# Altium PCB KAI_MEZON.PcbDoc
Units mm, origin at the board's own origin, x right, y up, seen from the top; angles counter-clockwise.
Board outline 64.77 x 55.7 mm, 2 copper layers (Top Layer, Bottom Layer); 3 components, 70 nets, 139 pads, 0 vias.
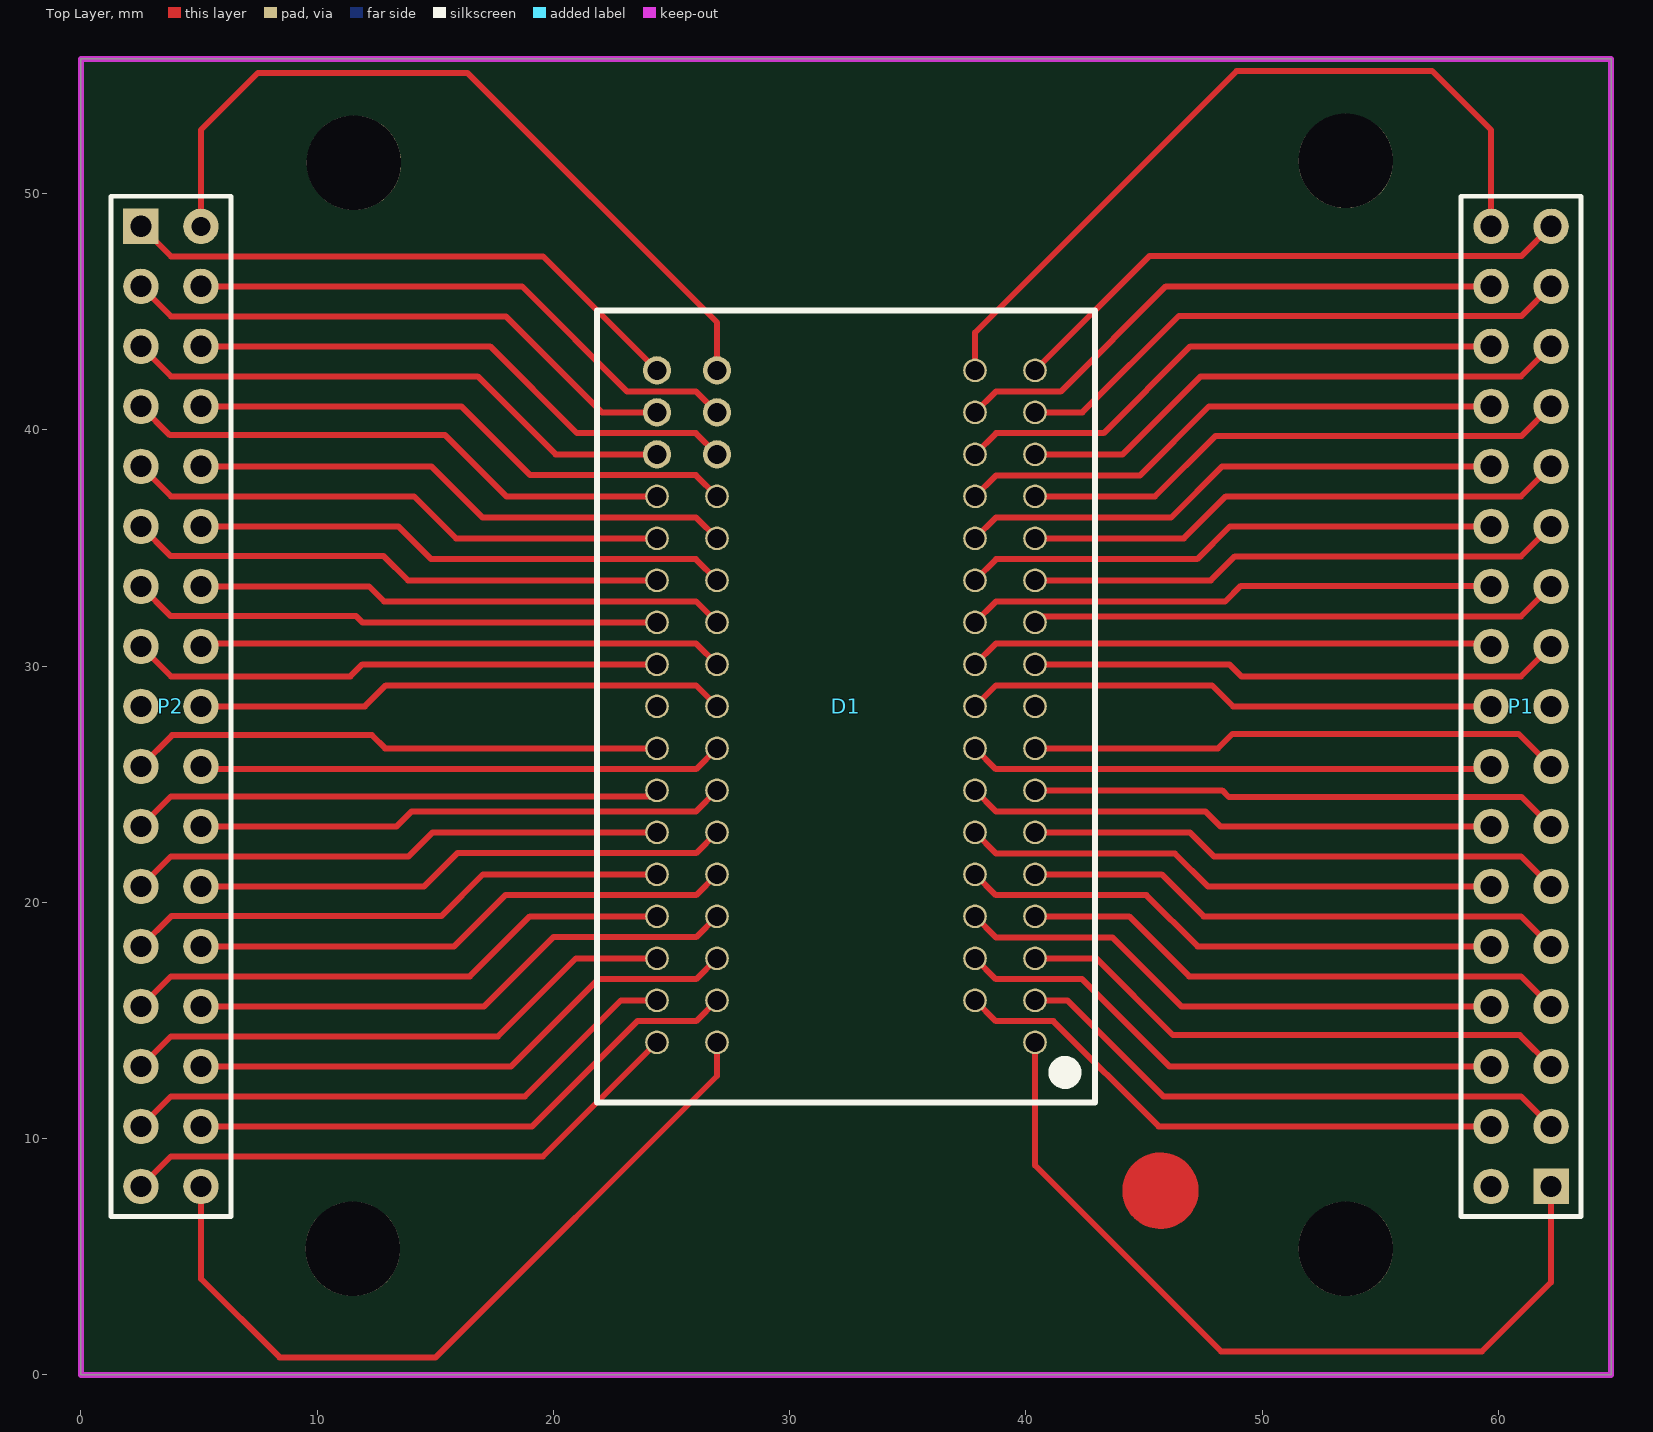
[diagram p0: Top Layer view]
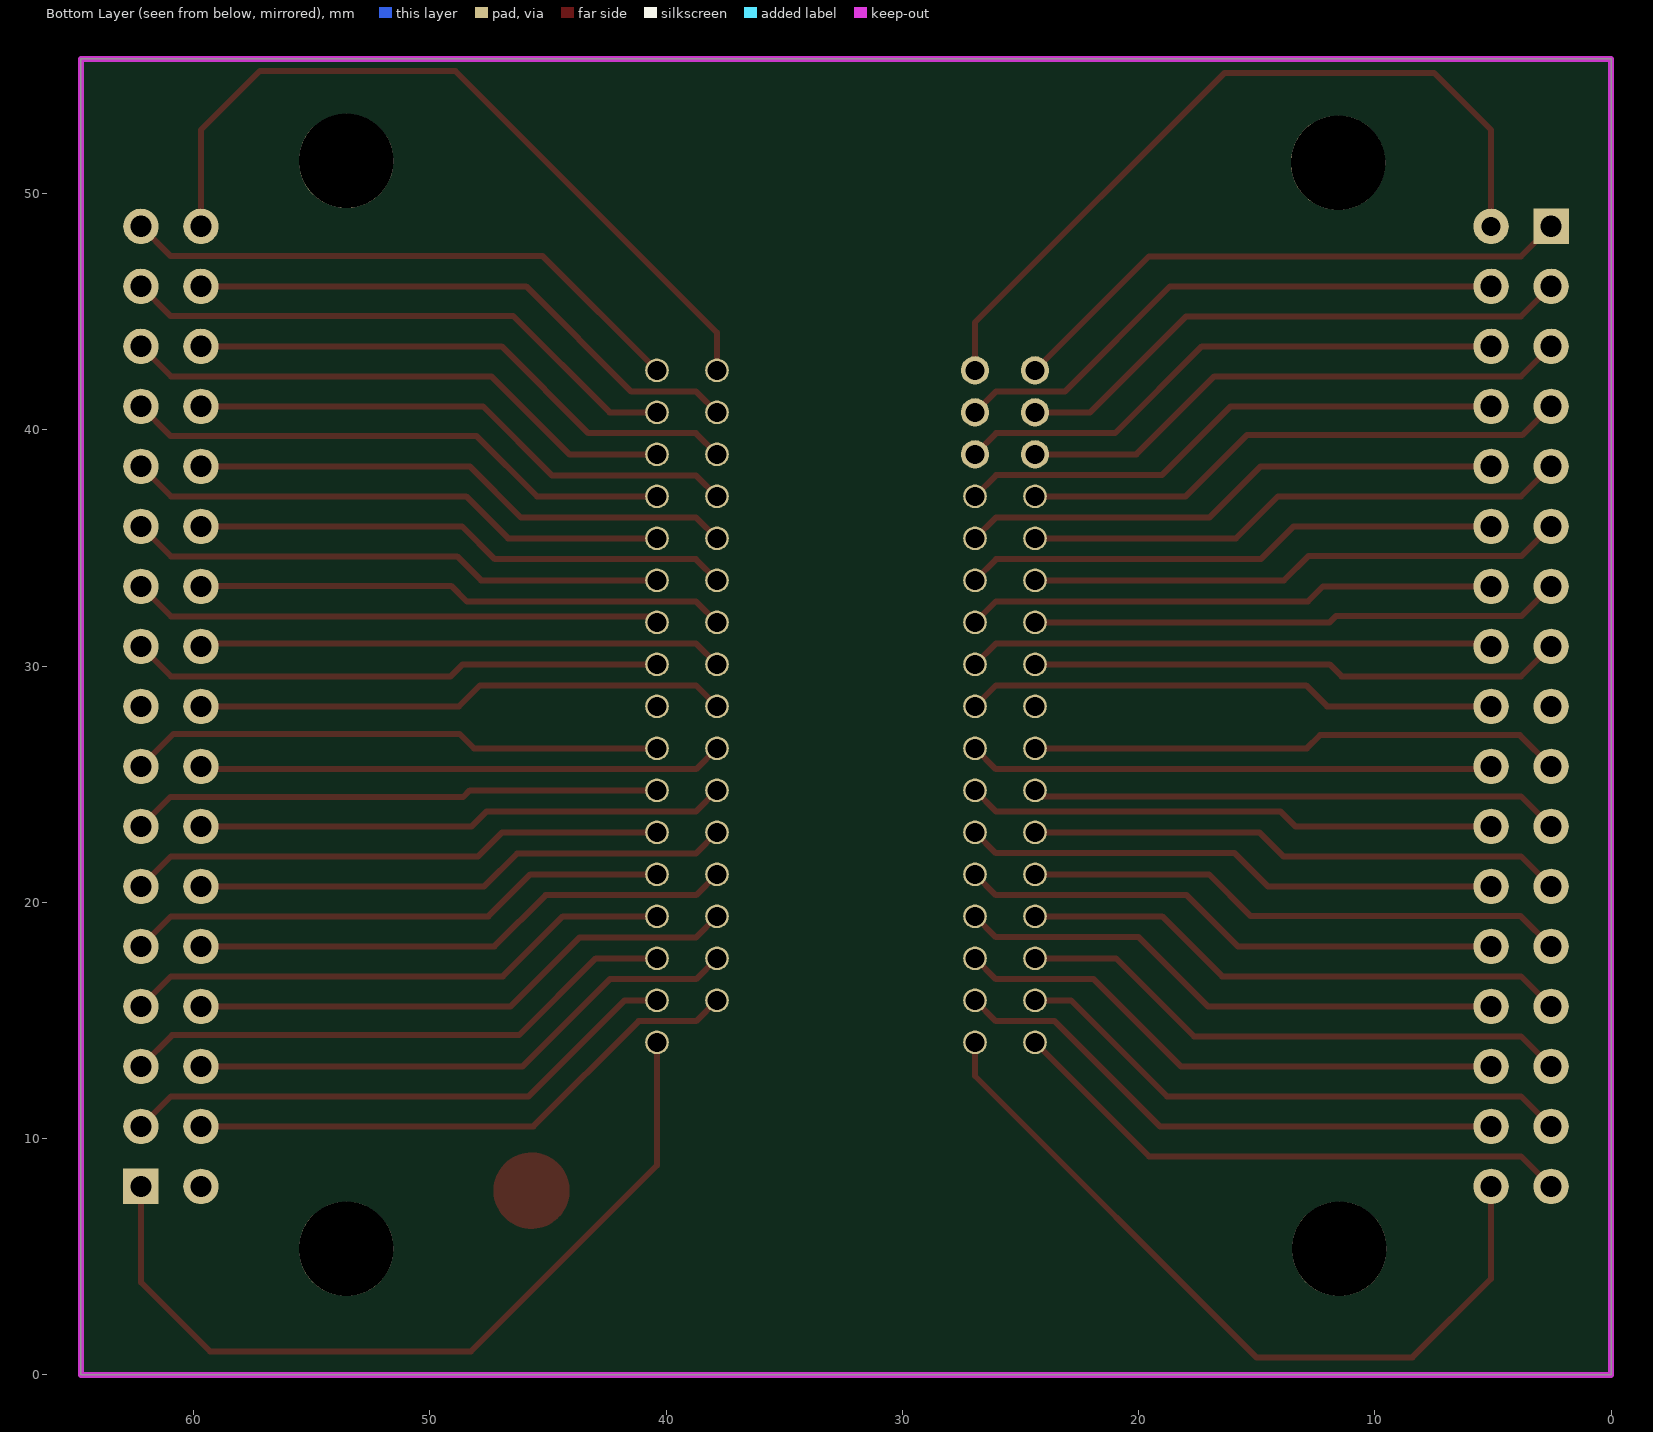
[diagram p1: Bottom Layer view, seen from below]

## Layer stack, top to bottom
Top Solder: solder mask 0.0102, Solder Resist, Dk 3.5
Top Layer: signal copper 0.0356
Dielectric 1: dielectric 0.32, FR-4, Dk 4.8
Bottom Layer: signal copper 0.0356
Bottom Solder: solder mask 0.0102, Solder Resist, Dk 3.5

## Board outline
0,0 0,55.702 64.77,55.702 64.77,0

## Design rules (kind name [scope] priority, off if disabled: settings)
Clearance [All] p1: gap=0.254
PolygonConnect [All] p1: connectstyle=Relief reliefconductorwidth=0.254 reliefentries=4 polygonreliefangle="90 Angle" airgapwidth=0.254
RoutingVias [All] p1: holewidth=0.711 width=1.27 viastyle="Through Hole" minholewidth=0.711 minwidth=1.27 maxholewidth=0.711 maxwidth=1.27
SolderMaskExpansion [All] p1: expansion=0.102
Width [All] p1: maxlimit=10.254 minlimit=0.125 preferedwidth=0.254
29 further rules are at their usual default settings.

## Classes and differential pairs
component class KAI_MEZON: D1 P2

## Components (designator, comment, footprint, x,y, rotation, side; value= is the part's Value field where it differs from the comment)
D1 "KAI02050" KAI_02050 40.386,14.072 r90 top
P1 "Header 17X2" HDR2X17#1 62.23,7.976 r90 top
P2 "Header 17X2" HDR2X17#2 2.54,48.616 r270 top

## Footprints (in the part's own frame and the unit in brackets; to place one, negate y for a bottom-side part, rotate by r counter-clockwise, add the part's x,y. Pads: shape width x height; smd on the part's side, far side on the other; paste and mask are expansions set on the pad)
HDR2X17#1 [mm] "Connector; Header; 17x2 Position"
  rect 1.5x1.5 hole 0.9: 1(0,0)
  round 1.5 hole 0.9: 2(0,2.54) 3(2.54,0) 4(2.54,2.54) 5(5.08,0) 6(5.08,2.54) 7(7.62,0) 8(7.62,2.54) 9(10.16,0) 10(10.16,2.54) 11(12.7,0) 12(12.7,2.54) 13(15.24,0) 14(15.24,2.54) 15(17.78,0) 16(17.78,2.54) 17(20.32,0) 18(20.32,2.54) 19(22.86,0) 20(22.86,2.54) 21(25.4,0) 22(25.4,2.54) 23(27.94,0) 24(27.94,2.54) 25(30.48,0) 26(30.48,2.54) 27(33.02,0) 28(33.02,2.54) 29(35.56,0) 30(35.56,2.54) 31(38.1,0) 32(38.1,2.54) 33(40.64,0) 34(40.64,2.54)
  silkscreen extent -1.27,-1.27 41.91,3.81
HDR2X17#2 [mm] "Connector; Header; 17x2 Position"
  rect 1.5x1.5 hole 0.9: 1(0,0)
  round 1.5 hole 0.8: 2(0,2.54)
  round 1.5 hole 0.9: 3(2.54,0) 4(2.54,2.54) 5(5.08,0) 6(5.08,2.54) 7(7.62,0) 8(7.62,2.54) 9(10.16,0) 10(10.16,2.54) 11(12.7,0) 12(12.7,2.54) 13(15.24,0) 14(15.24,2.54) 15(17.78,0) 16(17.78,2.54) 18(20.32,2.54) 19(22.86,0) 20(22.86,2.54) 21(25.4,0) 22(25.4,2.54) 23(27.94,0) 24(27.94,2.54) 25(30.48,0) 26(30.48,2.54) 27(33.02,0) 28(33.02,2.54) 29(35.56,0) 30(35.56,2.54) 31(38.1,0) 32(38.1,2.54) 33(40.64,0) 34(40.64,2.54) 51(20.32,0)
  silkscreen extent -1.27,-1.27 41.91,3.81
KAI_02050 [mm]
  round 1 hole 0.8: 1(0,0) 3(1.778,0) 4(1.778,2.54) 5(3.556,0) 6(3.556,2.54) 7(5.334,0) 8(5.334,2.54) 9(7.112,0) 10(7.112,2.54) 11(8.89,0) 12(8.89,2.54) 13(10.668,0) 14(10.668,2.54) 15(12.446,0) 16(12.446,2.54) 17(14.224,0) 18(14.224,2.54) 19(16.002,0) 20(16.002,2.54) 21(17.78,0) 22(17.78,2.54) 23(19.558,0) 24(19.558,2.54) 25(21.336,0) 26(21.336,2.54) 27(23.114,0) 28(23.114,2.54) 29(24.892,0) 30(24.892,2.54) 31(26.67,0) 32(26.67,2.54) 33(28.448,0) 34(28.448,2.54) 41(23.114,16.002) 42(23.114,13.462) 43(21.336,16.002) 44(21.336,13.462) 45(19.558,16.002) 46(19.558,13.462) 47(17.78,16.002) 48(17.78,13.462) 49(16.002,16.002) 50(16.002,13.462) 51(14.224,16.002) 52(14.224,13.462) 53(12.446,16.002) 54(12.446,13.462) 55(10.668,16.002) 56(10.668,13.462) 57(8.89,16.002) 58(8.89,13.462) 59(7.112,16.002) 60(7.112,13.462) 61(5.334,16.002) 62(5.334,13.462) 63(3.556,16.002) 64(3.556,13.462) 65(1.778,16.002) 66(1.778,13.462) 67(0,16.002) 68(0,13.462)
  round 1.2 hole 0.8: 35(28.448,16.002) 36(28.448,13.462) 37(26.67,16.002) 38(26.67,13.462) 39(24.892,16.002) 40(24.892,13.462)
  silkscreen extent -2.54,-2.54 30.99,18.54

## Part data
D1: library part KAI-02050
P1 P2: "Header, 17-Pin, Dual row"

## Free pads (board coordinates)
  round 4 hole 4: 0(11.506,5.334) 0(11.557,51.308) 0(53.543,5.334) 0(53.543,51.384)

## Nets (pads, with @x,y where several pads share a name; then routed paths per layer and width w, separated by ;. In a path a pad name is that pad's centre, name@x,y a point inside that pad or via, vN(x,y) a via of type N, cw(c..) or ccw(c..) an arc to the next point about the centre after c; other vN are vias at no path point)
1: D1.1 P1.1 | length 35.6
  Top Layer w0.254: D1.1 40.386,8.865 48.26,0.991 59.309,0.991 62.23,3.912 P1.1
3: D1.3 P1.3 | length 24.1
  Top Layer w0.254: D1.3 41.758,15.85 45.822,11.786 60.96,11.786 P1.3
4: D1.4 P1.4 | length 24.1
  Top Layer w0.254: D1.4 38.727,14.969 41.165,14.969 45.618,10.516 P1.4
5: D1.5 P1.5 | length 23.7
  Top Layer w0.254: D1.5 42.977,17.628 46.228,14.376 60.909,14.376 P1.5
6: D1.6 P1.6 | length 23.7
  Top Layer w0.254: D1.6 38.727,16.747 42.385,16.747 46.076,13.056 P1.6
7: D1.7 P1.7 | length 23.4
  Top Layer w0.254: D1.7 44.374,19.406 46.914,16.866 60.96,16.866 P1.7
8: D1.8 P1.8 | length 23.4
  Top Layer w0.254: D1.8 38.743,18.509 43.671,18.509 46.584,15.596 P1.8
9: D1.9 P1.9 | length 23.1
  Top Layer w0.254: D1.9 45.745,21.184 47.523,19.406 60.96,19.406 P1.9
10: D1.10 P1.10 | length 23.1
  Top Layer w0.254: D1.10 38.727,20.303 45.102,20.303 47.269,18.136 P1.10
11: D1.11 P1.11 | length 22.8
  Top Layer w0.254: D1.11 46.939,22.962 47.955,21.946 60.96,21.946 P1.11
12: D1.12 P1.12 | length 22.8
  Top Layer w0.254: D1.12 38.743,22.065 46.312,22.065 47.701,20.676 P1.12
13: D1.13 P1.13 | length 22.5
  Top Layer w0.254: D1.13 48.311,24.74 48.59,24.46 60.985,24.46 P1.13
14: D1.14 P1.14 | length 22.5
  Top Layer w0.254: D1.14 38.743,23.843 47.608,23.843 48.235,23.216 P1.14
15: D1.15 P1.15 | length 22.7
  Top Layer w0.254: D1.15 48.133,26.518 48.743,27.127 60.858,27.127 P1.15
16: D1.16 P1.16 | length 22.3
  Top Layer w0.254: D1.16 38.727,25.637 59.571,25.637 P1.16
17: D1.17
18: D1.18 P1.18 | length 22.6
  Top Layer w0.254: D1.18 38.735,29.185 47.879,29.185 48.768,28.296 P1.18
19: D1.19 P1.19 | length 22.6
  Top Layer w0.254: D1.19 48.616,30.074 49.124,29.566 60.96,29.566 P1.19
20: D1.20 P1.20 | length 22.3
  Top Layer w0.254: D1.20 38.727,30.955 59.571,30.955 P1.20
21: D1.21 P1.21 | length 22.5
  Top Layer w0.254: D1.21 40.64,32.106 60.96,32.106 P1.21
22: D1.22 P1.22 | length 22.5
  Top Layer w0.254: D1.22 38.727,32.733 48.43,32.733 49.098,33.401 59.665,33.401 P1.22
23: D1.23 P1.23 | length 22.8
  Top Layer w0.254: D1.23 47.828,33.63 48.844,34.646 60.96,34.646 P1.23
24: D1.24 P1.24 | length 22.8
  Top Layer w0.254: D1.24 38.743,34.527 47.252,34.527 48.641,35.916 P1.24
25: D1.25 P1.25 | length 23.1
  Top Layer w0.254: D1.25 46.685,35.408 48.463,37.186 60.96,37.186 P1.25
26: D1.26 P1.26 | length 23.1
  Top Layer w0.254: D1.26 38.727,36.289 46.144,36.289 48.311,38.456 P1.26
27: D1.27 P1.27 | length 23.4
  Top Layer w0.254: D1.27 45.466,37.186 48.031,39.751 60.985,39.751 P1.27
28: D1.28 P1.28 | length 23.4
  Top Layer w0.254: D1.28 38.727,38.067 44.823,38.067 47.752,40.996 P1.28
29: D1.29 P1.29 | length 23.7
  Top Layer w0.254: D1.29 44.094,38.964 47.396,42.266 60.96,42.266 P1.29
30: D1.30 P1.30 | length 23.7
  Top Layer w0.254: D1.30 38.743,39.861 43.29,39.861 46.965,43.536 P1.30
31: D1.31 P1.31 | length 24.1
  Top Layer w0.254: D1.31 42.393,40.742 46.482,44.831 60.985,44.831 P1.31
32: D1.32 P1.32 | length 24.1
  Top Layer w0.254: D1.32 38.727,41.623 41.47,41.623 45.923,46.076 P1.32
33: D1.33 P1.33 | length 24.4
  Top Layer w0.254: D1.33 45.237,47.371 60.985,47.371 P1.33
34: D1.34 P1.34 | length 33.2
  Top Layer w0.254: D1.34 37.846,44.12 48.92,55.194 57.201,55.194 59.69,52.705 P1.34
35: D1.35 P2.1 | length 24.4
  Top Layer w0.254: P2.1 3.81,47.346 19.558,47.346 D1.35
36: D1.36 P2.2 | length 33.3
  Top Layer w0.254: P2.2 5.08,52.705 7.493,55.118 16.358,55.118 26.924,44.552 D1.36
37: D1.37 P2.3 | length 24.1
  Top Layer w0.254: P2.3 3.81,44.806 17.983,44.806 22.047,40.742 D1.37
38: D1.38 P2.4 | length 24.1
  Top Layer w0.254: P2.4 18.669,46.076 23.122,41.623 26.043,41.623 D1.38
39: D1.39 P2.5 | length 23.7
  Top Layer w0.254: P2.5 3.81,42.266 16.789,42.266 20.091,38.964 D1.39
40: D1.40 P2.6 | length 23.7
  Top Layer w0.254: P2.6 17.323,43.536 20.998,39.861 26.027,39.861 D1.40
41: D1.41 P2.7 | length 23.4
  Top Layer w0.254: P2.7 3.759,39.776 15.418,39.776 18.009,37.186 D1.41
42: D1.42 P2.8 | length 23.4
  Top Layer w0.254: P2.8 16.104,40.996 19.017,38.083 26.027,38.083 D1.42
43: D1.43 P2.9 | length 23.1
  Top Layer w0.254: P2.9 3.81,37.186 14.097,37.186 15.875,35.408 D1.43
44: D1.44 P2.10 | length 23.1
  Top Layer w0.254: P2.10 14.834,38.456 17.001,36.289 26.043,36.289 D1.44
45: D1.45 P2.11 | length 22.8
  Top Layer w0.254: P2.11 3.785,34.671 12.802,34.671 13.843,33.63 D1.45
46: D1.46 P2.12 | length 22.8
  Top Layer w0.254: P2.12 13.437,35.916 14.826,34.527 26.027,34.527 D1.46
47: D1.47 P2.13 | length 22.5
  Top Layer w0.254: P2.13 3.785,32.131 11.633,32.131 11.913,31.852 D1.47
48: D1.48 P2.14 | length 22.5
  Top Layer w0.254: P2.14 12.192,33.376 12.827,32.741 26.035,32.741 D1.48
49: D1.49 P2.15 | length 22.6
  Top Layer w0.254: P2.15 3.81,29.566 11.405,29.566 11.913,30.074 D1.49
50: D1.50 P2.16 | length 22.3
  Top Layer w0.254: P2.16 5.199,30.955 26.043,30.955 D1.50
51: D1.51
52: D1.52 P2.18 | length 22.6
  Top Layer w0.254: P2.18 12.014,28.296 12.903,29.185 26.035,29.185 D1.52
53: D1.53 P2.19 | length 22.6
  Top Layer w0.254: P2.19 3.861,27.076 12.319,27.076 12.878,26.518 D1.53
54: D1.54 P2.20 | length 22.3
  Top Layer w0.254: P2.20 5.199,25.637 26.043,25.637 D1.54
55: D1.55 P2.21 | length 22.5
  Top Layer w0.254: P2.21 3.81,24.486 24.13,24.486 D1.55
56: D1.56 P2.22 | length 22.5
  Top Layer w0.254: P2.22 13.36,23.216 13.987,23.843 26.027,23.843 D1.56
57: D1.57 P2.23 | length 22.8
  Top Layer w0.254: P2.23 3.81,21.946 13.868,21.946 14.884,22.962 D1.57
58: D1.58 P2.24 | length 22.8
  Top Layer w0.254: P2.24 14.529,20.676 15.934,22.081 26.043,22.081 D1.58
59: D1.59 P2.25 | length 23.1
  Top Layer w0.254: P2.25 3.835,19.431 15.265,19.431 17.018,21.184 D1.59
60: D1.60 P2.26 | length 23.1
  Top Layer w0.254: P2.26 15.799,18.136 17.966,20.303 26.043,20.303 D1.60
61: D1.61 P2.27 | length 23.4
  Top Layer w0.254: P2.27 3.81,16.866 16.459,16.866 18.999,19.406 D1.61
62: D1.62 P2.28 | length 23.4
  Top Layer w0.254: P2.28 17.069,15.596 19.998,18.525 26.043,18.525 D1.62
63: D1.63 P2.29 | length 23.7
  Top Layer w0.254: P2.29 3.81,14.326 17.653,14.326 20.955,17.628 D1.63
64: D1.64 P2.30 | length 23.7
  Top Layer w0.254: P2.30 18.212,13.056 21.903,16.747 26.043,16.747 D1.64
65: D1.65 P2.31 | length 24.1
  Top Layer w0.254: P2.31 3.81,11.786 18.796,11.786 22.86,15.85 D1.65
66: D1.66 P2.32 | length 24.1
  Top Layer w0.254: P2.32 19.101,10.516 23.554,14.969 26.043,14.969 D1.66
67: D1.67 P2.33 | length 24.4
  Top Layer w0.254: P2.33 3.81,9.246 19.558,9.246 D1.67
68: D1.68 P2.34 | length 33.5
  Top Layer w0.254: P2.34 5.08,4.064 8.407,0.737 15.011,0.737 26.924,12.649 D1.68
NetP3_1: 
NetP4_1: 
NetR1_2: 
pads on no net: P1.2 P1.17 P2.51
copper on no net: | length 5
  Top Layer w1.651: 46.486,7.798 ccw(c45.695,7.798) 46.486,7.798

## Keep-outs
Keep-Out Layer:
  the board outline again, w0.254